# EAGLE board Board_layout (EAGLE 9.6.2)
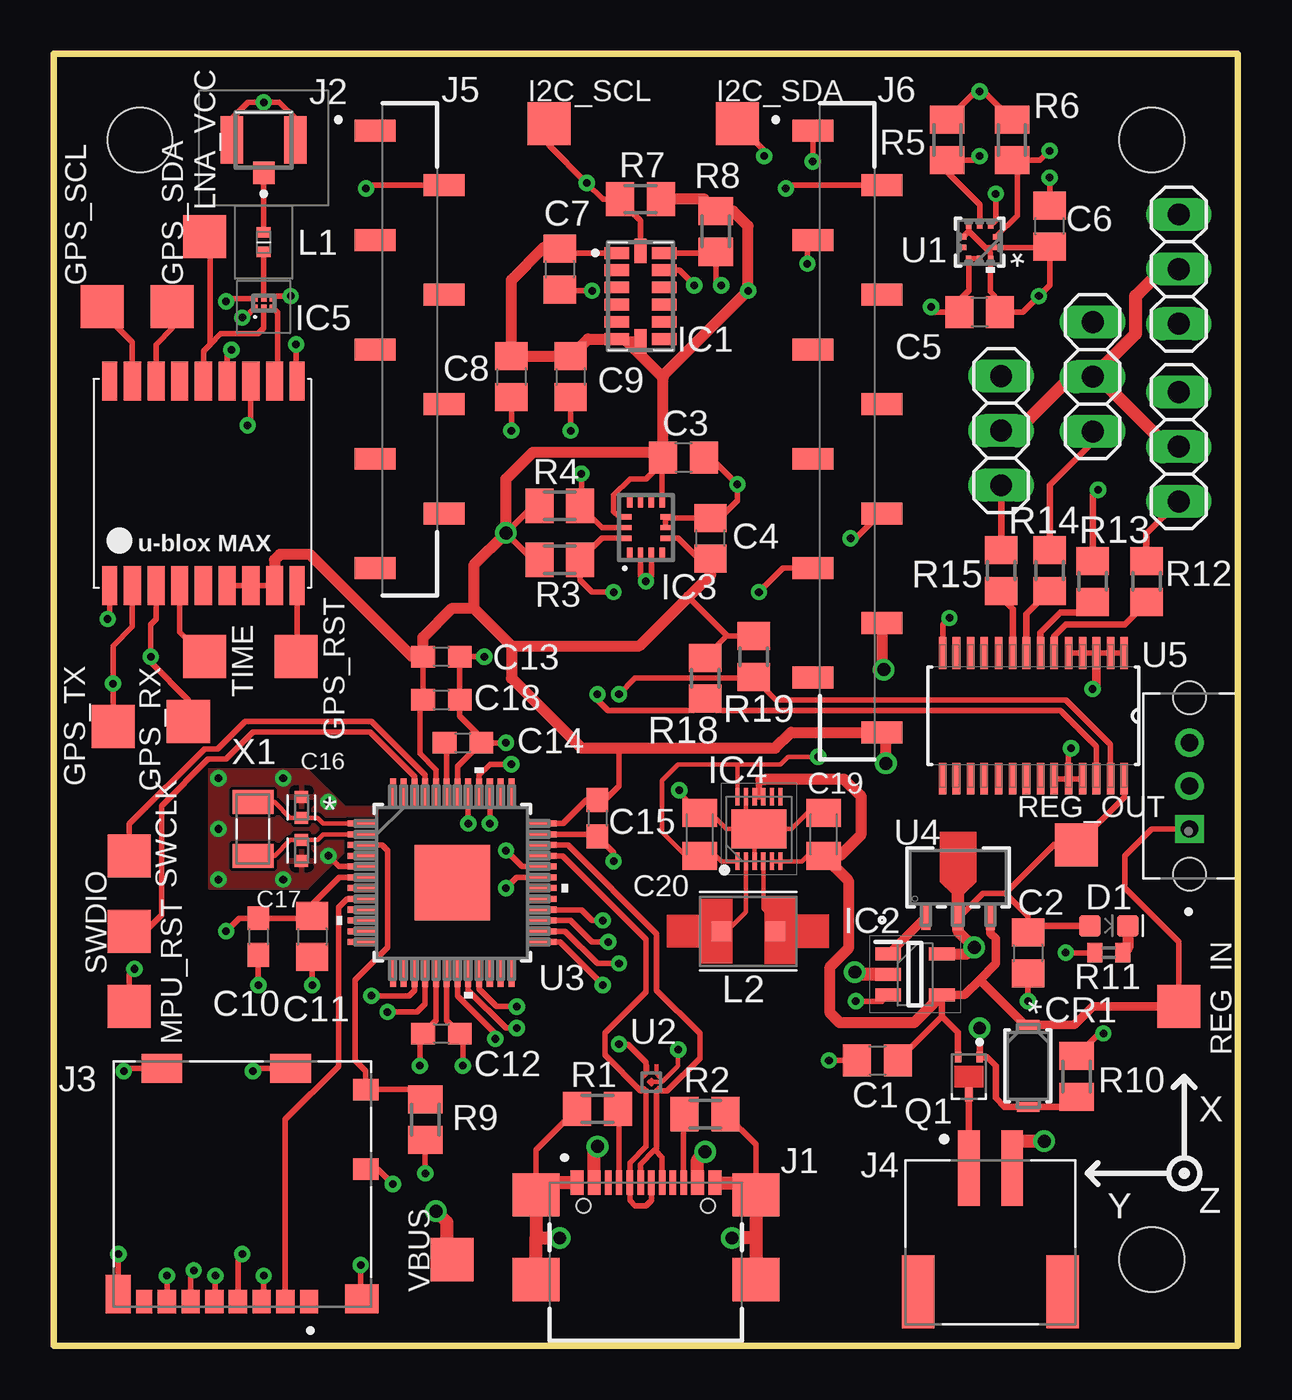
[diagram p0: board, top side]
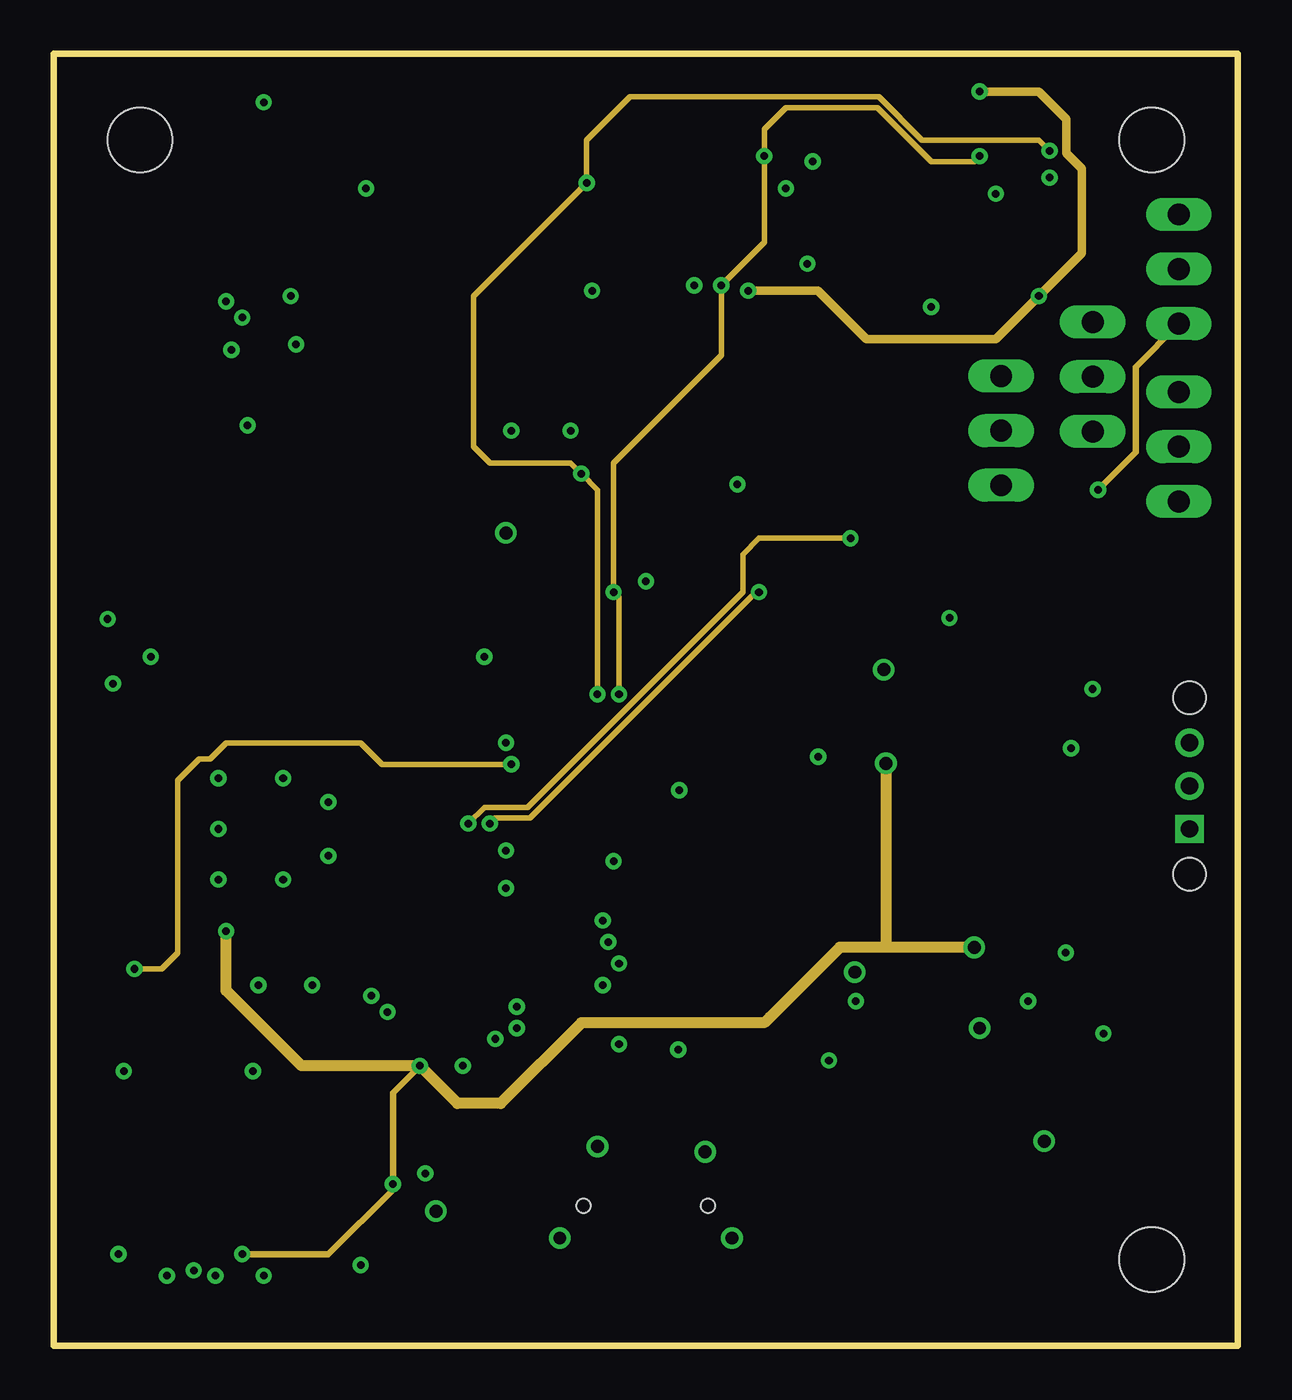
[diagram p1: board, inner layer Route2]
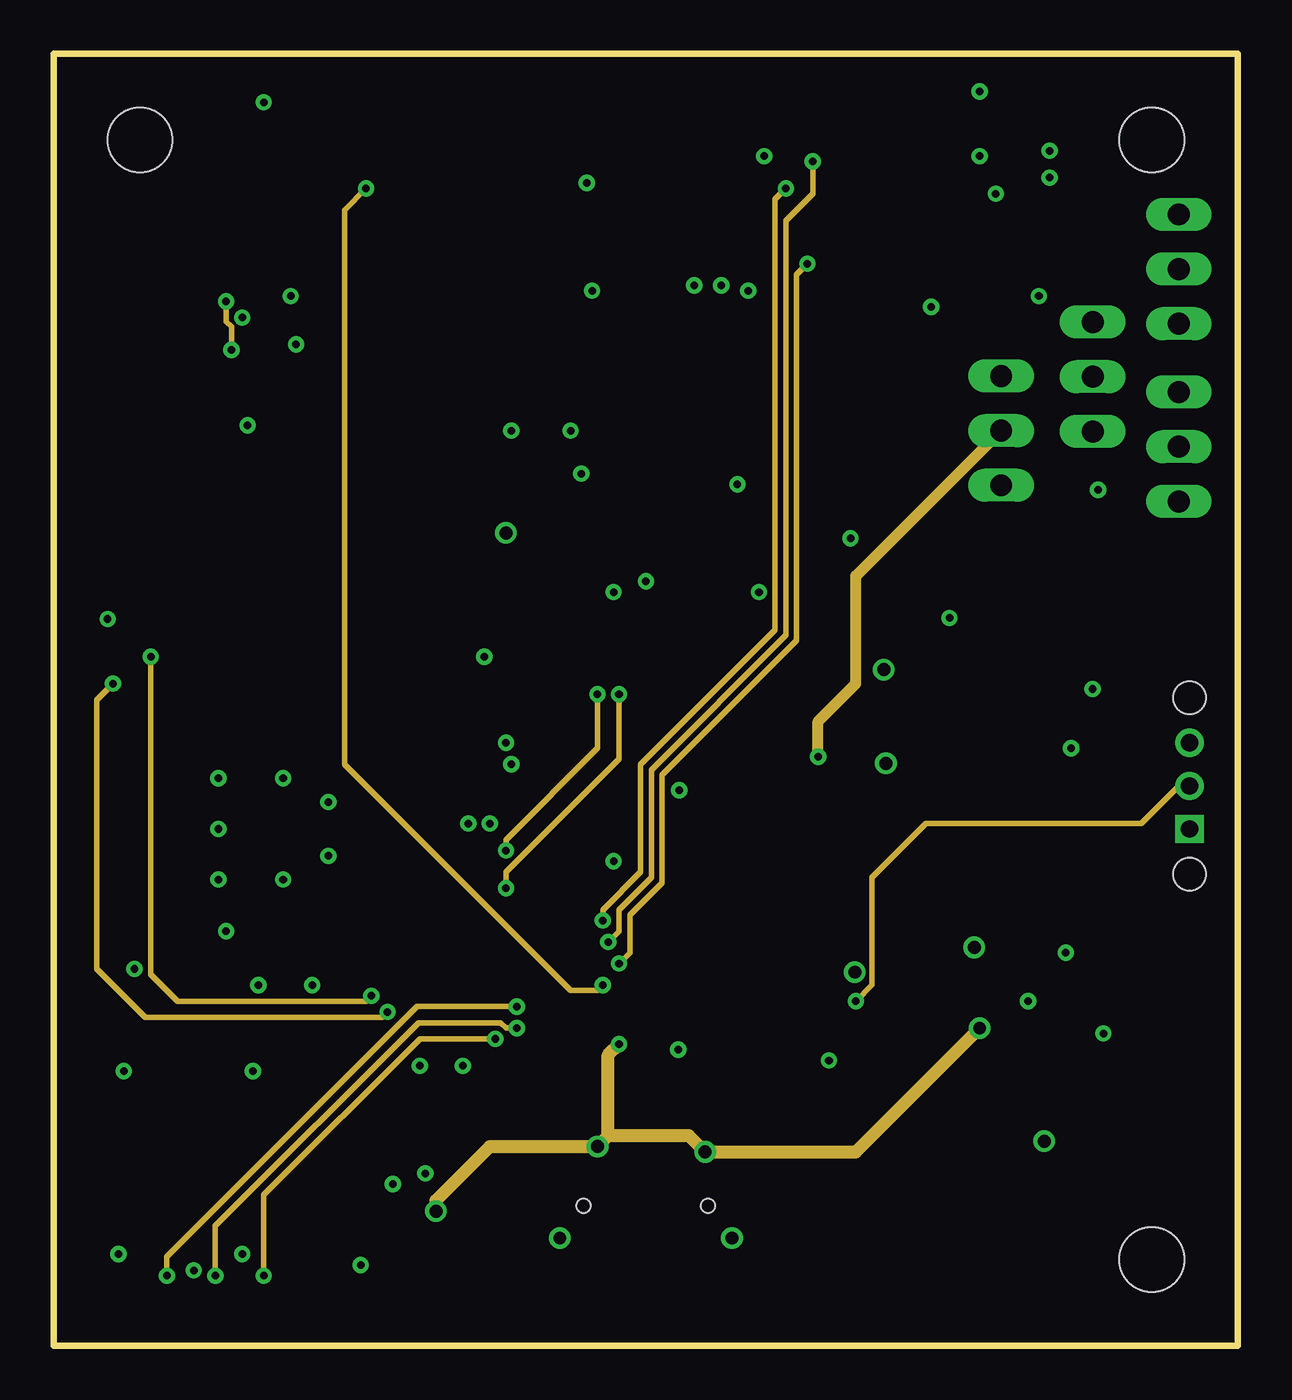
[diagram p2: board, inner layer Route15]
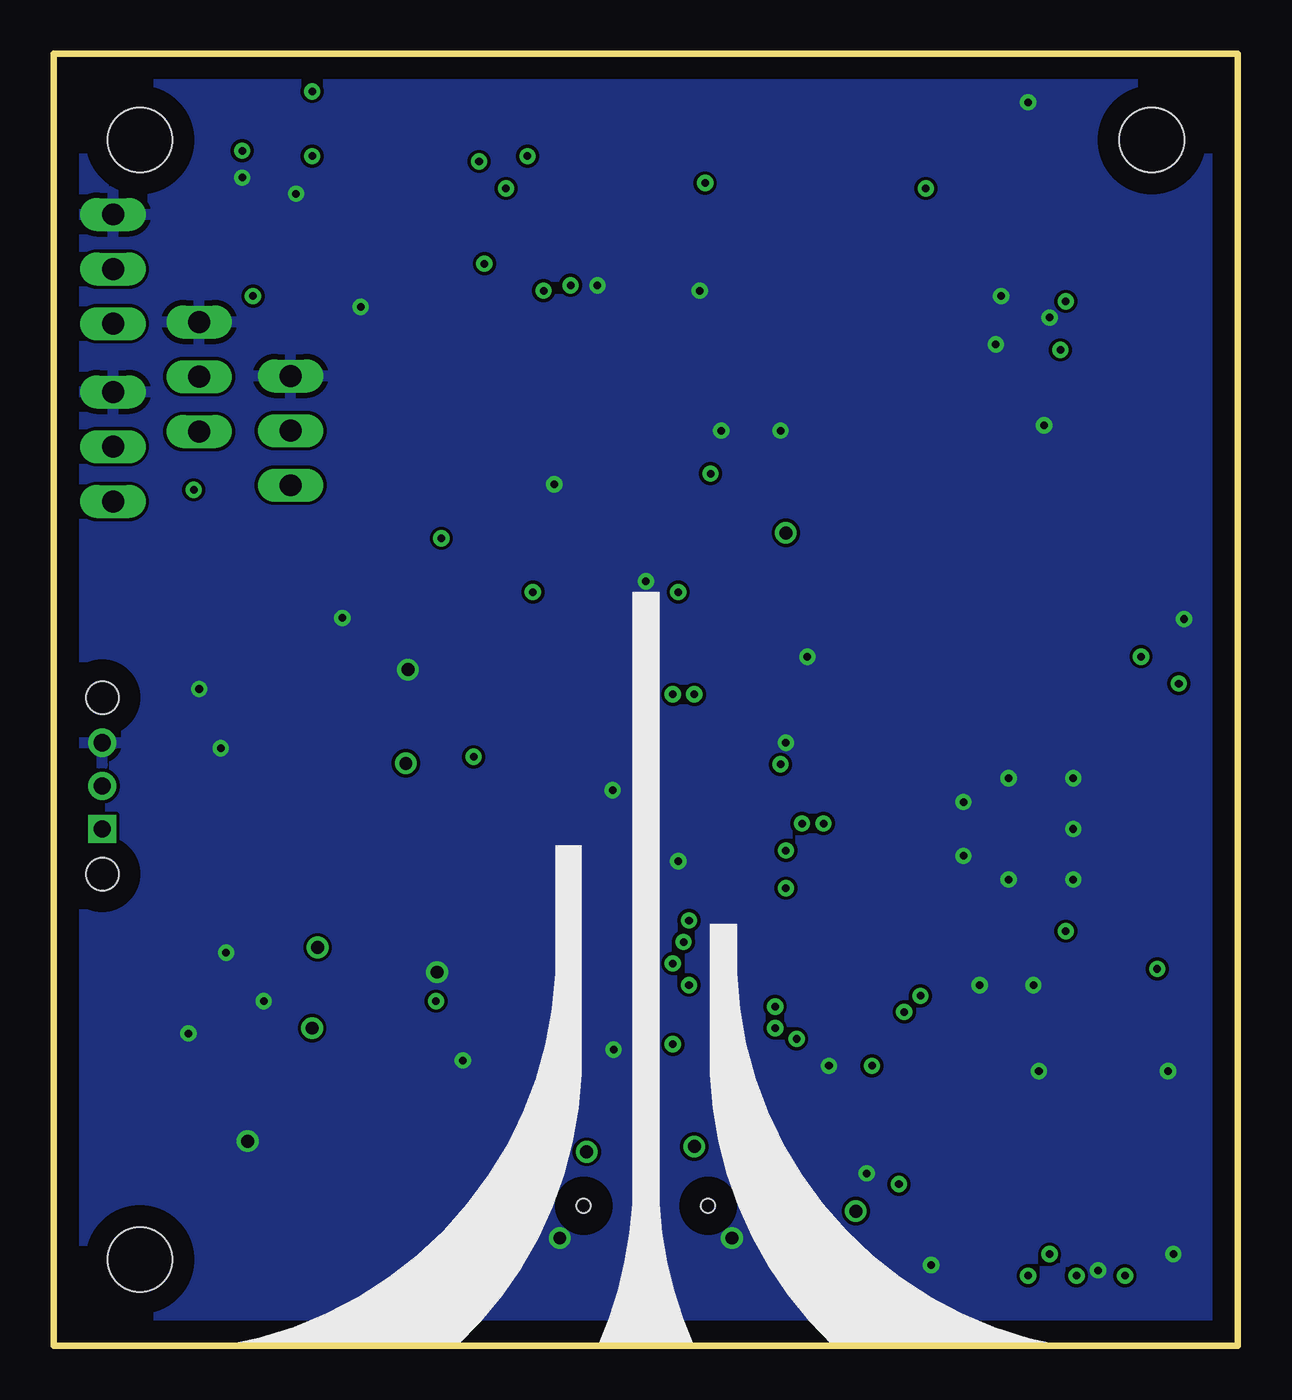
[diagram p3: board, bottom side, seen from below]

Size 55 x 60 mm. Coordinates in mm from the lower left corner, seen from the top.
Outline: 0,0 0,60 55,60 55,0 0,0
Copper layers (1+2*15+16): Top 0.035mm / dielectric 1.5mm / Route2 0.035mm / dielectric 0.15mm / Route15 0.035mm / dielectric 0.2mm / Bottom 0.035mm
Design rules "default *": minimum track width 6mil, minimum drill 0.35mm, track to track 6mil, track to pad 6mil, pad to pad 6mil, via to via 6mil, smd to smd 6mil, copper to edge 40mil, drill to drill 6mil, minimum pad ring 10mil, minimum via ring 8mil, stop-mask expansion 4mil, vias tented up to drill 0mil, thermal gap 10mil
Holes 3 mm at 51,56 4,56 51,4

## Footprints (pad centres in the part's own frame; a part is rotated, then mirrored left to right if it is on the bottom)
C0805 = smd 1.3 x 1.5: 1 -0.95,0; 2 0.95,0
C0603 = smd 1.1 x 1: 1 -0.85,0; 2 0.85,0
CAPC1005X60 = smd 0.56 x 0.629: 1 -0.485,0; 2 0.485,0
C0805K = smd 1.3 x 1.6: 1 -1,0; 2 1,0
CR_5817PL-TP_MCC = smd 0.457 x 1.041: 1 -1.905,0; 2 1.905,0
LED-0603 = smd 1 x 1: A -0.877,0; C 0.877,0
TP20SQ = smd 2 x 2: TP 0,0
CC-14-1 = smd 1.145 x 0.55: 1 -1.097,2; 2 -1.097,1.2; 3 -1.097,0.4; 4 -1.097,-0.4; 5 -1.097,-1.2; 6 -1.097,-2; 8 1.097,-2; 9 1.097,-1.2; 10 1.097,-0.4; 11 1.097,0.4; 12 1.097,1.2; 13 1.097,2 | smd 0.55 x 1.145: 7 0,-2.098; 14 0,2.098
SOT95P275X130-5N = smd 1.2 x 0.6: 1 -1.25,0.95; 2 -1.25,0; 3 -1.25,-0.95; 4 1.25,-0.95; 5 1.25,0.95
LGA-14(2.5X3X0.86) = smd 0.475 x 0.25: 1 -1.163,0.75; 2 -1.163,0.25; 3 -1.163,-0.25; 4 -1.163,-0.75; 8 1.163,-0.75; 9 1.163,-0.25; 10 1.163,0.25; 11 1.163,0.75 | smd 0.25 x 0.475: 5 -0.5,-0.912; 6 0,-0.912; 7 0.5,-0.912; 12 0.5,0.912; 13 0,0.912; 14 -0.5,0.912
SON40P300X300X75-13N = smd 0.8 x 0.2: 1 -1.5,1; 2 -1.5,0.6; 3 -1.5,0.2; 4 -1.5,-0.2; 5 -1.5,-0.6; 6 -1.5,-1; 7 1.5,-1; 8 1.5,-0.6; 9 1.5,-0.2; 10 1.5,0.2; 11 1.5,0.6; 12 1.5,1 | smd 1.8 x 2.55: 13 0,0
BGS12SN6E6327XTSA1 = smd 0.25 x 0.25: 1 -0.025,0.4; 2 -0.025,0; 3 -0.025,-0.4; 4 0.375,-0.4; 5 0.375,0; 6 0.375,0.4
GCT_USB4110-GF-A_REVB = smd 0.6 x 1.15: A1/B12 -3.2,1.075; A4/B9 -2.4,1.075; B1/A12 3.2,1.075; B4/A9 2.4,1.075 | smd 0.3 x 1.15: A5 -1.25,1.075; A6 -0.25,1.075; A7 0.25,1.075; A8 1.25,1.075; B5 1.75,1.075; B6 0.75,1.075; B7 -0.75,1.075; B8 -1.75,1.075 | smd 2.18 x 2: S1 -5.11,0.5; S2 5.11,0.5; S3 -5.11,-3.43; S4 5.11,-3.43 | hole 0.65: -2.89,0; 2.89,0
23370191 = smd 1 x 1.05: 1 0,-1.525 | smd 1.05 x 2.2: 2 -1.475,0; 3 1.475,0
MOLEX_104031-0811 = smd 0.85 x 1.1: 1 3.105,-5.45; 2 2.005,-5.45; 3 0.905,-5.45; 4 -0.195,-5.45; 5 -1.295,-5.45; 6 -2.395,-5.45; 7 -3.495,-5.45 | smd 0.75 x 1.1: 8 -4.545,-5.45 | smd 1.2 x 1: 9 5.74,0.7; 10 5.74,4.4 | smd 1.55 x 1.35: G1 5.565,-5.325 | smd 1.17 x 1.8: G2 -5.755,-5.1 | smd 1.9 x 1.35: G3 -3.73,5.375; G4 2.24,5.375
JST_S2B-PH-SM4-TB(LF)(SN) = smd 1 x 3.5: 1 -1,0; 2 1,0 | smd 1.5 x 3.4: S1 -3.35,-5.75; S2 3.35,-5.75
SAMTEC_SSM-109-L-SV = smd 1.02 x 1.905: 01 10.16,1.603; 02 7.62,-1.603; 03 5.08,1.603; 04 2.54,-1.603; 05 0,1.603; 06 -2.54,-1.603; 07 -5.08,1.603; 08 -7.62,-1.603; 09 -10.16,1.603
SAMTEC_SSM-112-L-SV-P = smd 1.02 x 1.905: 01 13.97,1.603; 02 11.43,-1.603; 03 8.89,1.603; 04 6.35,-1.603; 05 3.81,1.603; 06 1.27,-1.603; 07 -1.27,1.603; 08 -3.81,-1.603; 09 -6.35,1.603; 10 -8.89,-1.603; 11 -11.43,1.603; 12 -13.97,-1.603
1X03 = drill 1.016 long: 1 -2.54,0; 2 0,0; 3 2.54,0
LQW15CNR20J00B = smd 0.5 x 0.66: 1 -0.45,0; 2 0.45,0
IND_LQH43PN2R2M26L = smd 0.9 x 0.9: 1 -1.25,0; 2 1.25,0
TRANS_DMG3415UFY4Q-7 = smd 0.5 x 0.31: 1 -0.9,0.5; 2 -0.9,-0.5 | smd 0.65 x 0.31: 3 0.825,0
M0805 = smd 1.3 x 1.6: 1 -0.95,0; 2 0.95,0
R0402 = smd 0.7 x 0.9: 1 -0.65,0; 2 0.65,0
R0805 = smd 1.3 x 1.5: 1 -0.95,0; 2 0.95,0
SW_OS102011MS2QN1 = drill 0.8 square: 1 -2,0 | drill 0.8: 2 0,0; 3 2,0 | hole 1.5: -4.1,0; 4.1,0
BMP390L_BOS = smd 0.279 x 0.254: 1 -0.76,0.25; 2 -0.76,-0.25; 6 0.76,-0.25; 7 0.76,0.25 | smd 0.254 x 0.279: 3 -0.5,-0.76; 4 0,-0.76; 5 0.5,-0.76; 8 0.5,0.76; 9 0,0.76; 10 -0.5,0.76
DPW4 = smd 0.025 x 0.025: 1 -0.417,0.24; 2 -0.417,-0.24; 3 0.417,-0.24; 4 0.417,0.24 | smd 0 x 0 bottom: 5 0,0
TQFP48_7X7MC_MCH = smd 1.341 x 0.279: 1 -4.176,2.75; 2 -4.176,2.25; 3 -4.176,1.75; 4 -4.176,1.25; 5 -4.176,0.75; 6 -4.176,0.25; 7 -4.176,-0.25; 8 -4.176,-0.75; 9 -4.176,-1.25; 10 -4.176,-1.75; 11 -4.176,-2.25; 12 -4.176,-2.75; 25 4.176,-2.75; 26 4.176,-2.25; 27 4.176,-1.75; 28 4.176,-1.25; 29 4.176,-0.75; 30 4.176,-0.25; 31 4.176,0.25; 32 4.176,0.75; 33 4.176,1.25; 34 4.176,1.75; 35 4.176,2.25; 36 4.176,2.75 | smd 0.279 x 1.341: 13 -2.75,-4.176; 14 -2.25,-4.176; 15 -1.75,-4.176; 16 -1.25,-4.176; 17 -0.75,-4.176; 18 -0.25,-4.176; 19 0.25,-4.176; 20 0.75,-4.176; 21 1.25,-4.176; 22 1.75,-4.176; 23 2.25,-4.176; 24 2.75,-4.176; 37 2.75,4.176; 38 2.25,4.176; 39 1.75,4.176; 40 1.25,4.176; 41 0.75,4.176; 42 0.25,4.176; 43 -0.25,4.176; 44 -0.75,4.176; 45 -1.25,4.176; 46 -1.75,4.176; 47 -2.25,4.176; 48 -2.75,4.176 | smd 3.505 x 3.505: EPAD 0,0
PCP-3_2P5X4P5_ONS = smd 0.406 x 1.194: 1 -1.5,-1.841; 3 1.5,-1.841 | smd 0.508 x 1.194: 2 0,-1.841
SOP65P640X110-28N = smd 1.473 x 0.356: 1 -2.921,4.216; 2 -2.921,3.581; 3 -2.921,2.921; 4 -2.921,2.286; 5 -2.921,1.626; 6 -2.921,0.965; 7 -2.921,0.33; 8 -2.921,-0.33; 9 -2.921,-0.965; 10 -2.921,-1.626; 11 -2.921,-2.286; 12 -2.921,-2.921; 13 -2.921,-3.581; 14 -2.921,-4.216; 15 2.921,-4.216; 16 2.921,-3.581; 17 2.921,-2.921; 18 2.921,-2.286; 19 2.921,-1.626; 20 2.921,-0.965; 21 2.921,-0.33; 22 2.921,0.33; 23 2.921,0.965; 24 2.921,1.626; 25 2.921,2.286; 26 2.921,2.921; 27 2.921,3.581; 28 2.921,4.216
MAX-M8 = smd 1.8 x 0.7: 1_GND 4.95,-4.4; 9_RESET_N 4.95,4.3; 10_GND -4.55,4.3; 18_SAFEBOOT_N -4.55,-4.4 | smd 1.8 x 0.8: 2_TXD 4.95,-3.35; 3_RXD 4.95,-2.25; 4_TIMEPULSE 4.95,-1.15; 5_EXTINT 4.95,-0.05; 6_V_BCKP 4.95,1.05; 7_VCC_IO 4.95,2.15; 8_VCC 4.95,3.25; 11_RF_IN -4.55,3.25; 12_GND -4.55,2.15; 13_LNA_EN -4.55,1.05; 14_VCC_RF -4.55,-0.05; 15_V_ANT/RESERVED -4.55,-1.15; 16_SDA -4.55,-2.25; 17_SCL -4.55,-3.35
XTAL_ECS-.327-7-34B-TR = smd 1.1 x 1.9: 1 -1.25,0; 2 1.25,0

## Placement (x,y rotation side)
C1  10u  [C0805]  38.25,13.25 0 top
C2  10u  [C0805]  45.25,18.25 270 top
C3  0.1u  [C0805]  29.25,41.25 0 top
C4  0.1u  [C0805]  30.5,37.5 90 top
C5  0.1u  [C0805]  43,48 180 top
C6  0.1u  [C0805]  46.25,52 90 top
C7  0.1u  [C0805]  23.5,50 270 top
C8  0.1u  [C0805]  21.25,45 270 top
C9  10u  [C0805]  24,45 270 top
C10  0.1u  [C0603]  9.5,19 270 top
C11  10u  [C0805]  12,19 270 top
C12  0.1u  [C0603]  18,14.5 0 top
C13  0.1u  [C0603]  18,32 0 top
C14  1u  [C0603]  19,28 0 top
C15  0.1u  [C0603]  25.25,24.5 270 top
C16  11p  [CAPC1005X60]  11.5,25 90 top
C17  11p  [CAPC1005X60]  11.5,23 270 top
C18  10u  [C0603]  18,30 0 top
C19  10u  [C0805K]  35.75,23.75 90 top
C20  10u  [C0805K]  30,23.75 90 top
CR1  SM5817PL-TP  [CR_5817PL-TP_MCC]  45.25,13 270 top
D1  WHITE  [LED-0603]  49,19.5 0 top
E$1  [LOGO]  27.5,0 0 top
GPS_RST  TPSQTP20SQ  [TP20SQ]  11.25,32 270 top
GPS_RX  TPSQTP20SQ  [TP20SQ]  6.25,29 90 top
GPS_SCL  TPSQTP20SQ  [TP20SQ]  2.25,48.25 270 top
GPS_SDA  TPSQTP20SQ  [TP20SQ]  5.5,48.25 270 top
GPS_TX  TPSQTP20SQ  [TP20SQ]  2.75,28.75 90 top
I2C_SCL  TPSQTP20SQ  [TP20SQ]  23,56.75 0 top
I2C_SDA  TPSQTP20SQ  [TP20SQ]  31.75,56.75 0 top
IC1  ADXL375BCCZ  [CC-14-1]  27.25,48.75 0 top
IC2  S-816A50AMC-BAZT2G  [SOT95P275X130-5N]  40,17.25 0 top
IC3  ISM330DHCXTR  [LGA-14(2.5X3X0.86)]  27.5,38 90 top
IC4  ISL9110IRT7Z-T7A  [SON40P300X300X75-13N]  32.75,24 90 top
IC5  BGA725L6E6327FTSA1  [BGS12SN6E6327XTSA1]  9.75,48.25 90 top
J1  USB4110-GF-A_REVB  [GCT_USB4110-GF-A_REVB]  27.5,6.5 0 top
J2  2337019-1  [23370191]  9.75,56 0 top
J3  104031-0811  [MOLEX_104031-0811]  8.75,7.5 0 top
J4  S2B-PH-SM4-TB(LF)(SN)  [JST_S2B-PH-SM4-TB(LF)(SN)]  43.5,8.25 0 top
J5  SSM-109-L-SV  [SAMTEC_SSM-109-L-SV]  16.53,46.27 90 top
J6  SSM-112-L-SV-P  [SAMTEC_SSM-112-L-SV-P]  36.85,42.46 90 top
JP1  [1X03]  52.25,41.75 90 top
JP2  [1X03]  52.25,50 90 top
JP3  [1X03]  48.25,45 90 top
JP4  [1X03]  44,42.5 90 top
L1  LQW15AN7N5G8ZD  [LQW15CNR20J00B]  9.75,51.25 90 top
L2  LQH43PN2R2M26L  [IND_LQH43PN2R2M26L]  32.25,19.25 0 top
LNA_VCC  TPSQTP20SQ  [TP20SQ]  7,51.5 270 top
MPU_RST  TPSQTP20SQ  [TP20SQ]  3.5,15.75 0 top
Q1  DMG3415UFY4Q-7  [TRANS_DMG3415UFY4Q-7]  42.5,12.5 270 top
R1  5.1K  [M0805]  25.25,11 0 top
R2  5.1K  [M0805]  30.25,10.75 0 top
R3  10K  [M0805]  23.5,36.5 180 top
R4  10K  [M0805]  23.5,39 180 top
R5  10K  [M0805]  41.5,56 90 top
R6  10K  [M0805]  44.5,56 90 top
R7  10K  [M0805]  27.25,53.25 180 top
R8  10K  [M0805]  30.75,51.75 270 top
R9  10K  [M0805]  17.25,10.5 90 top
R10  10K  [M0805]  47.5,12.5 270 top
R11  620 Ω  [R0402]  49,18.25 0 top
R12  220  [R0805]  50.75,35.5 90 top
R13  220  [R0805]  48.25,35.5 90 top
R14  220  [R0805]  46.25,36 90 top
R15  220  [R0805]  44,36 90 top
R18  10K  [R0805]  30.25,31 270 top
R19  10K  [R0805]  32.5,32 90 top
REG_IN  TPSQTP20SQ  [TP20SQ]  52.25,15.75 0 top
REG_OUT  TPSQTP20SQ  [TP20SQ]  47.5,23.25 0 top
S1  OS102011MS2QN1  [SW_OS102011MS2QN1]  52.75,26 90 top
SWCLK  TPSQTP20SQ  [TP20SQ]  3.5,22.75 0 top
SWDIO  TPSQTP20SQ  [TP20SQ]  3.5,19.25 0 top
TIME  TPSQTP20SQ  [TP20SQ]  7,32 270 top
U1  BMP390L  [BMP390L_BOS]  43,51.25 180 top
U2  TPD4E101DPWR  [DPW4]  27.75,12.25 90 top
U3  ATSAMD21G15B-AFT  [TQFP48_7X7MC_MCH]  18.5,21.5 0 top
U4  2SA2125-TD-E  [PCP-3_2P5X4P5_ONS]  42,21.75 0 top
U5  PCA9685PW,112  [SOP65P640X110-28N]  45.5,29.25 270 top
U$1  MAX-M8  [MAX-M8]  7,40.25 270 top
VBUS  TPSQTP20SQ  [TP20SQ]  18.5,4 180 top
X1  ECS-.327-7-34B-TR  [XTAL_ECS-.327-7-34B-TR]  9.25,24 90 top

## Library data of the parts
C1-C8 C10-C15 C18-C20 R1-R15 R18 R19 = resistor
C9 = resistor; POLARIZED: True
C16 C17 = Capacitor; CATEGORY: Capacitor
CR1 = SM5817PL-TP; COPYRIGHT: Copyright (C) 2022 Ultra Librarian. All rights reserved.; DIGI-KEY_PART_NUMBER_1: SM5817PL-TPMSTR-ND; DIGI-KEY_PART_NUMBER_2: SM5817PL-TPMSCT-ND; DIGI-KEY_PART_NUMBER_3: SM5817PL-TPMSDKR-ND; MANUFACTURER_PART_NUMBER: SM5817PL-TP; MFR_NAME: MCC
D1 = SparkFun-LED; PROD_ID: DIO-09004
E$1 = logo
GPS_RST GPS_RX GPS_SCL GPS_SDA GPS_TX I2C_SCL I2C_SDA LNA_VCC MPU_RST REG_IN REG_OUT SWCLK SWDIO TIME VBUS = testpad
IC1 = ADXL375BCCZ; DESCRIPTION: ADXL375BCCZ Analog Devices, 3-Axis Accelerometer, I2C, Serial-3 Wire, Serial-4 Wire, Serial-SPI, 14-Pin LGA; HEIGHT: mm; MANUFACTURER_NAME: Analog Devices; MANUFACTURER_PART_NUMBER: ADXL375BCCZ; MOUSER_PART_NUMBER: 584-ADXL375BCCZ; MOUSER_PRICE-STOCK: https://www.mouser.co.uk/ProductDetail/Analog-Devices/ADXL375BCCZ?qs=S4ILP0tmc7Q%2Fd%2FHPWf9YpQ%3D%3D
IC2 = S-816A50AMC-BAZT2G; DESCRIPTION: IC REG LINEAR 5V 1A SOT23-5; HEIGHT: 1.3mm; MANUFACTURER_NAME: ABLIC Inc.; MANUFACTURER_PART_NUMBER: S-816A50AMC-BAZT2G; MOUSER_PART_NUMBER: 628-S-816A50AMC-BAZG; MOUSER_PRICE-STOCK: https://www.mouser.com/Search/Refine.aspx?Keyword=628-S-816A50AMC-BAZG
IC3 = ISM330DHCXTR; DESCRIPTION: IMUs - Inertial Measurement Units VFLGA2.5X3X.86 14L P.5 L.475X.25; HEIGHT: mm; MANUFACTURER_NAME: STMicroelectronics; MANUFACTURER_PART_NUMBER: ISM330DHCXTR; MOUSER_PART_NUMBER: 511-ISM330DHCXTR; MOUSER_PRICE-STOCK: https://www.mouser.co.uk/ProductDetail/STMicroelectronics/ISM330DHCXTR?qs=%252B6g0mu59x7Jv2Xps2dM6Xw%3D%3D
IC4 = ISL9110IRT7Z-T7A; DESCRIPTION: Switching Voltage Regulators 1 2A SINGLE IND BUCK BOOST 3 3V 12LD; HEIGHT: 0.75mm; MANUFACTURER_NAME: Renesas Electronics; MANUFACTURER_PART_NUMBER: ISL9110IRT7Z-T7A; MOUSER_PART_NUMBER: 968-ISL9110IRT7Z-T7A; MOUSER_PRICE-STOCK: https://www.mouser.co.uk/ProductDetail/Renesas-Intersil/ISL9110IRT7Z-T7A?qs=dAsayXGOMrujtMdmCjK0tg%3D%3D
IC5 = BGA725L6E6327FTSA1; DESCRIPTION: INFINEON - BGA725L6E6327FTSA1 - RF AMP, 20DB, 1.615GHZ, 3.6V, TSLP-6; HEIGHT: mm; MANUFACTURER_NAME: Infineon; MANUFACTURER_PART_NUMBER: BGA725L6E6327FTSA1; MOUSER_PART_NUMBER: 726-BGA725L6E6327FTS; MOUSER_PRICE-STOCK: https://www.mouser.co.uk/ProductDetail/Infineon-Technologies/BGA725L6E6327FTSA1?qs=4MqXaUMeF57lT69yR2PUGQ%3D%3D
J1 = USB4110-GF-A_REVB; DESCRIPTION: USB-C (USB TYPE-C) USB 2.0 Receptacle Connector 24 (16+8 Dummy) Position Surface Mount, Right Angle; Through Hole; DIGI-KEY_PART_NUMBER: 2073-USB4110-GF-A-2-ND; MF: GCT; MP: USB4110-GF-A; PACKAGE: None; PURCHASE-URL: https://pricing.snapeda.com/search/part/USB4110-GF-A/?ref=eda
J2 = 2337019-1; DESCRIPTION: RF Connectors / Coaxial Connectors MicroCoax receptacle UMCC Gen 1; HEIGHT: 1.4mm; MANUFACTURER_NAME: TE Connectivity; MANUFACTURER_PART_NUMBER: 2337019-1; MOUSER_PART_NUMBER: 571-2337019-1; MOUSER_PRICE-STOCK: https://www.mouser.co.uk/ProductDetail/TE-Connectivity/2337019-1?qs=l4Gc20tDgJIuN7nS9rJkJw%3D%3D
J3 = 104031-0811; DESCRIPTION: 10 (8 + 2) Position Card Connector Secure Digital - microSD™ Surface Mount, Right Angle Gold; DIGI-KEY_PART_NUMBER: WM6357TR-ND; MF: Molex; MP: 1040310811; PACKAGE: None
J4 = S2B-PH-SM4-TB_LF__SN_; DESCRIPTION: Connector Header Surface Mount, Right Angle 2 position 0.079 (2.00mm); DIGI-KEY_PART_NUMBER: 455-1749-1-ND; MF: JST Sales; MP: S2B-PH-SM4-TB(LF)(SN); PACKAGE: None
J5 = SSM-109-L-SV; DESCRIPTION: 9 Position Receptacle, Bottom Entry Connector 0.100 (2.54mm) Surface Mount Gold; DIGI-KEY_PART_NUMBER: 612-SSM-109-L-SV-BE-LC-TR-ND; MF: Samtec; MP: SSM-109-L-SV; PACKAGE: None; PURCHASE-URL: https://pricing.snapeda.com/search/part/SSM-109-L-SV/?ref=eda
J6 = SSM-112-L-SV-P; DESCRIPTION: 12 Position Receptacle, Pass Through Connector 0.100 (2.54mm) Surface Mount Gold; DIGI-KEY_PART_NUMBER: SSM-112-L-SV-P-TR-ND; MF: Samtec; MP: SSM-112-L-SV-P; PACKAGE: None; PURCHASE-URL: https://pricing.snapeda.com/search/part/SSM-112-L-SV-P/?ref=eda
JP1-JP4 = pinhead
L1 = LQW15AN7N5G8ZD; DESCRIPTION: LQW15AN_8Z Series Inductor 7.5nH +/-2% 0402 (1005); HEIGHT: 0.6mm; MANUFACTURER_NAME: Murata Electronics; MANUFACTURER_PART_NUMBER: LQW15AN7N5G8ZD; MOUSER_PART_NUMBER: 81-LQW15AN7N5G8ZD; MOUSER_PRICE-STOCK: https://www.mouser.com/Search/Refine.aspx?Keyword=81-LQW15AN7N5G8ZD
L2 = LQH43PN2R2M26L; DESCRIPTION: Inductor with Inductance: 2.2uH Tol. +/-20%, Package: 1812 (4532); DIGI-KEY_PART_NUMBER: 490-12049-1-ND; MF: Murata; MP: LQH43PN2R2M26L; PACKAGE: NONSTANDARD; PURCHASE-URL: https://pricing.snapeda.com/search/part/LQH43PN2R2M26L/?ref=eda
Q1 = DMG3415UFY4Q-7; DESCRIPTION: P-Channel 16 V 2.5A (Ta) 650mW (Ta) Surface Mount X2-DFN2015-3; DIGI-KEY_PART_NUMBER: DMG3415UFY4Q-7DICT-ND; MF: Diodes Inc.; MP: DMG3415UFY4Q-7; PACKAGE: DFN-2 Diodes Inc.; PURCHASE-URL: https://pricing.snapeda.com/search/part/DMG3415UFY4Q-7/?ref=eda
S1 = OS102011MS2QN1; DESCRIPTION: SLIDE SWITCH SPDT T/H ON-ON BBM; DIGI-KEY_PART_NUMBER: CKN12284-ND; MF: C&K; MP: OS102011MS2QN1; PACKAGE: None; PURCHASE-URL: https://pricing.snapeda.com/search/part/OS102011MS2QN1/?ref=eda
U1 = BMP390L; COPYRIGHT: Copyright (C) 2022 Ultra Librarian. All rights reserved.; DIGI-KEY_PART_NUMBER_1: 828-BMP390LTR-ND; DIGI-KEY_PART_NUMBER_2: 828-BMP390LCT-ND; MANUFACTURER_PART_NUMBER: BMP390L; MFR_NAME: Bosch Sensortec
U2 = TPD4E101DPWR; COPYRIGHT: Copyright (C) 2021 Ultra Librarian. All rights reserved.; DIGI-KEY_PART_NUMBER_1: 2156-TPD4E101DPWR-ND; DIGI-KEY_PART_NUMBER_2: 296-39345-1-ND; DIGI-KEY_PART_NUMBER_3: 296-39345-2-ND; DIGI-KEY_PART_NUMBER_4: 296-39345-6-ND; DIGI-KEY_PART_NUMBER_5: TPD4E101DPWR-ND; MANUFACTURER_PART_NUMBER: TPD4E101DPWR; MFR_NAME: Texas Instruments
U3 = ATSAMD21G15B-AFT; COPYRIGHT: Copyright (C) 2021 Ultra Librarian. All rights reserved.; DIGI-KEY_PART_NUMBER_1: 1611-ATSAMD21G15B-AFTCT-ND; DIGI-KEY_PART_NUMBER_2: ATSAMD21G15B-AFTCT-ND; DIGI-KEY_PART_NUMBER_3: ATSAMD21G15B-AFTDKR-ND; DIGI-KEY_PART_NUMBER_4: ATSAMD21G15B-AFTTR-ND; MANUFACTURER_PART_NUMBER: ATSAMD21G15B-AFT; MFR_NAME: Microchip
U4 = ‎2SA2125; COPYRIGHT: Copyright (C) 2022 Ultra Librarian. All rights reserved.; DIGI-KEY_PART_NUMBER_1: 2SA2125-TD-EOSTR-ND; DIGI-KEY_PART_NUMBER_2: 2SA2125-TD-EOSCT-ND; DIGI-KEY_PART_NUMBER_3: 2SA2125-TD-EOSDKR-ND; MANUFACTURER_PART_NUMBER: 2SA2125-TD-E; MFR_NAME: onsemi
U5 = PCA9685PW_112; DESCRIPTION: LED Driver IC 16 Output Linear - PWM Dimming 25mA 28-TSSOP; DIGI-KEY_PART_NUMBER: 568-8366-5-ND; MF: NXP USA; MP: PCA9685PW,112; PACKAGE: TSSOP-28 NXP Semiconductors; PURCHASE-URL: https://pricing.snapeda.com/search/part/PCA9685PW,112/?ref=eda
U$1 = ubloxLib
X1 = ECS-.327-7-34B-TR; DESCRIPTION: 32.768 kHz ±20ppm Crystal 7pF 70 kOhms 2-SMD, No Lead; DIGI-KEY_PART_NUMBER: XC1656CT-ND; MF: ECS Inc.; MP: ECS-.327-7-34B-TR; PACKAGE: SMD-2 ECS International; PURCHASE-URL: https://pricing.snapeda.com/search/part/ECS-.327-7-34B-TR/?ref=eda

## Nets
3V3: C2.1 C3.1 C4.1 C5.1 C6.1 C7.1 C8.1 C9.1 C10.1 C11.1 C12.1 C13.1 C15.1 C18.1 D1.A IC1.1 IC1.6 IC1.7 IC2.5 IC3.5 IC3.8 IC3.12 J3.4 J3.9 J6.12 R3.2 R4.2 R5.2 R6.2 R7.1 R8.1 R18.1 R19.2 REG_OUT.TP U1.1 U1.5 U1.6 U1.10 U3.6 U3.17 U3.36 U3.44 U4.2 U5.28 U$1.6_V_BCKP U$1.7_VCC_IO U$1.8_VCC
+5V: C20.1 IC4.1 IC4.12 JP1.2 JP2.2 JP3.2 JP4.2
ANTENNA: J2.1 L1.2
BRD_EN: IC2.3 S1.2
D+: J1.A6 J1.B6 U2.2 U3.34
D-: J1.A7 J1.B7 U2.1 U3.33
DIO0: J6.09 U3.39
DIO1: J6.08 U3.41
GND: C1.1 C2.2 C3.2 C4.2 C5.2 C6.2 C7.2 C8.2 C9.2 C10.2 C11.2 C12.2 C13.2 C14.2 C15.2 C16.2 C17.2 C18.2 C19.2 C20.2 IC1.12 IC2.2 IC3.2 IC3.3 IC3.6 IC3.7 IC4.3 IC4.11 IC4.13 IC5.1 IC5.4 J1.A1/B12 J1.B1/A12 J1.S1 J1.S2 J1.S3 J1.S4 J2.2 J2.3 J3.6 J3.G1 J3.G2 J3.G3 J3.G4 J4.2 J6.10 JP1.3 JP2.3 JP3.3 JP4.3 R1.1 R2.2 R9.1 R10.1 R11.1 S1.3 U1.3 U1.8 U1.9 U2.5 U3.5 U3.18 U3.35 U3.42 U5.1 U5.2 U5.3 U5.4 U5.5 U5.14 U5.23 U5.24 U5.25 U$1.1_GND U$1.10_GND U$1.12_GND
I2C_SCL: I2C_SCL.TP IC1.14 IC3.13 R4.1 R6.1 R7.2 R18.2 U1.2 U3.32 U5.26
I2C_SDA: I2C_SDA.TP IC1.13 IC3.14 R3.1 R5.1 R8.2 R19.1 U1.4 U3.31 U5.27
LNA_EN: IC5.6 U$1.13_LNA_EN
LNA_OUT: IC5.3 U$1.11_RF_IN
LNA_VCC: IC5.2 LNA_VCC.TP U$1.14_VCC_RF
M0: JP1.1 R12.2
M1: JP2.1 R13.2
M2: JP3.1 R14.2
M3: JP4.1 R15.2
MPU_RX: GPS_TX.TP U3.16 U$1.2_TXD
MPU_TX: GPS_RX.TP U3.15 U$1.3_RXD
N$1: J1.A5 R1.2
N$2: J1.B5 R2.1
N$3: MPU_RST.TP U3.40
N$4: IC5.5 L1.1
N$5: TIME.TP U$1.4_TIMEPULSE
N$6: C14.1 U3.43
N$7: GPS_RST.TP U$1.9_RESET_N
N$8: IC2.1 U4.1
N$9: GPS_SDA.TP U$1.16_SDA
N$10: GPS_SCL.TP U$1.17_SCL
N$11: SWCLK.TP U3.45
N$12: SWDIO.TP U3.46
N$13: D1.C R11.2
N$14: IC4.4 L2.2
N$15: IC4.2 L2.1
N$16: R12.1 U5.6
N$17: R13.1 U5.7
N$18: R14.1 U5.8
N$19: R15.1 U5.9
RF_CLK: J6.03 U3.26
RF_CS: J5.02 U3.25
RF_DI: J6.02 U3.28
RF_DO: J6.01 U3.27
SD_CLK: J3.5 U3.20
SD_CS: J3.2 U3.8
SD_DETECT: J3.10 R9.2 U3.3
SD_DI: J3.3 U3.19
SD_DO: J3.7 U3.21
VBAT: J4.1 Q1.3
VBUS: CR1.2 J1.A4/B9 J1.B4/A9 Q1.1 R10.2 U2.4 VBUS.TP
WVI: C1.2 C19.1 CR1.1 IC2.4 IC4.5 IC4.6 IC4.9 IC4.10 Q1.2 REG_IN.TP S1.1 U4.3
XIN32: C16.1 U3.1 X1.2
XOUT32: C17.1 U3.2 X1.1

## Tracks (layer width: path | path; a pad name or v marks a point on that pad's centre or on a via)
3V3  (via drill 0.35, 0.6)
  Top 0.25: IC1.6 26.5,46.75 27.15,46.75 IC1.7 | IC1.1 23.7,50.75 23.6,50.85 C7.1 | IC3.5 29,37.5 29.95,36.55 C4.1 | IC3.8 28.25,41 | 28.25,41 28.25,41.2 C3.1 | R3.2 22.25,36.5 v21,37.75 22.25,39 R4.2 | U1.5 42.5,51.76 | U1.6 42.5,51.76 | 42.5,51.76 43.26,51 | 43.26,51 U1.1 46.2,51 C6.1 46.25,49.25 v45.75,48.75 45,48 C5.1 43.95,48.5 43.5,48.95 U1.10 43.5,50.76 43.26,51 | U3.17 17.75,15.1 C12.1 17,14.35 v17,13 | C13.1 C18.1 17,29.85 17,28.5 17,27.5 17.75,26.75 U3.44 | U3.6 13.25,21.75 12,20.5 C11.1 11.9,19.85 C10.1 8.6,19.85 v8,19.25 | U3.36 23.65,24.25 24.75,25.35 C15.1 25.6,25.35 26.25,26 26.25,27 26.25,27.25 26.25,27.5 26.25,27.75 | U4.2 42.07,19.91 43.16,21 44.2,21 45.25,19.95 C2.1 | U$1.8_VCC U$1.7_VCC_IO U$1.6_V_BCKP | J3.4 8.55,4.05 v8.75,4.25 | v15.75,7.5 15.05,8.2 J3.9 | IC3.12 26.25,38.5 26,38.75 26,39.5 26.75,40.25 27.5,40.25 28.25,41 | R5.2 42.8,58.25 v43,58.25 43.2,58.25 R6.2 | R18.1 31.25,32.95 | 31.25,32.95 R19.2 | 31.25,32.95 31.25,33 29.48,34.77 | REG_OUT.TP 49.72,25.47 U5.28
  Top 0.31: C2.1 45.55,19.5 D1.A | 44.2,21 46.45,23.25 REG_OUT.TP
  Top 0.5: IC2.5 42.45,18.2 v42.75,18.5 42,19.25 U4.2 | 21.25,32.5 21.25,31 24.5,27.75 26.25,27.75 33.5,27.75 34.24,28.49 J6.12 38.65,28.29 v38.65,27.05 | 17.15,32.15 C13.1 | C13.1 16.65,32 11.9,36.75 10.5,36.75 10.25,36.5 U$1.8_VCC | 28.25,41.2 27.95,41.5 22.25,41.5 21,40.25 v21,37.75 19.5,36.25 19.5,34.25 | C3.1 28.3,44.95 | 28.3,44.95 26.5,46.75 | IC1.6 24.8,46.75 C9.1 C8.1 21.25,49.5 22.75,51 23.45,51 23.6,50.85 | 28.3,44.95 28.3,45.05 v32.25,49 32.25,52 31.55,52.7 R8.1 30.2,53.25 R7.1 | 19.5,34.25 21.25,32.5 | C13.1 17.15,32.9 18.5,34.25 19.5,34.25 | 21.25,32.5 27.2,32.5 29.48,34.77 30.5,35.8 C4.1
  Route2 0.3: v8.75,4.25 12.75,4.25 15.75,7.25 v15.75,7.5 15.75,11.75 v17,13
  Route2 0.4: v32.25,49 35.5,49 37.75,46.75 43.75,46.75 v45.75,48.75 47.75,50.75 47.75,54.66 47.03,55.38 47.03,56.97 45.75,58.25 v43,58.25
  Route2 0.5: v42.75,18.5 38.65,18.5 | v38.65,27.05 38.65,18.5 | v8,19.25 8,16.5 11.5,13 v17,13 18.75,11.25 20.75,11.25 24.5,15 33,15 33.25,15.25 36.5,18.5 38.65,18.5
+5V  (via drill 0.35)
  Top 0.2: IC4.1 31,22.5 30.75,22.75 C20.1 29.35,22.75 28.25,23.85 28.25,26.25 29,27 31.75,27 | 31.75,27 32.25,27 33.75,27 34.1,27.35 v35.5,27.35 | IC4.12 31.75,27
  Top 0.6: JP4.2 44.75,42.5 47.25,45 JP3.2 | JP3.2 48.5,45 49.25,44.25 51.75,41.75 JP1.2 | JP3.2 50.25,47 50.25,48.75 51.5,50 JP2.2
  Route15 0.5: v35.5,27.35 35.5,29 35.75,29.25 37.25,30.75 37.25,35.75 JP4.2
ANTENNA
  Top 0.25: J2.1 L1.2
BRD_EN  (via drill 0.35)
  Top 0.25: v37.25,16 38.45,16 IC2.3
  Route15 0.25: v37.25,16 38,16.75 38,21.75 40.5,24.25 50.5,24.25 52.25,26 S1.2
D+
  Top 0.25: J1.A6 27.25,8.43 27.91,9.09 | 27.91,9.09 28.25,8.76 J1.B6 | 27.91,9.09 27.99,9.17 U2.2 28.49,11.83 30,13.34 30,14.5 28,16.5 28,19.12 23.88,23.25 U3.34
D-
  Top 0.25: J1.A7 27.75,6.75 27.5,6.5 27,6.5 26.75,6.75 J1.B7 26.75,8.5 27.51,9.26 U2.1 27.26,11.83 25.59,13.5 25.59,14.52 27.5,16.43 27.5,18.88 23.62,22.75 U3.33
DIO0  (via drill 0.35)
  Top 0.25: U3.39 v20.25,24.25 | v32.75,35 33.86,36.11 J6.09
  Route2 0.25: v20.25,24.25 20.5,24.5 22.11,24.5 32.61,35 v32.75,35
DIO1  (via drill 0.35)
  Top 0.25: U3.41 v19.25,24.25 | v37,37.5 37.25,37.5 38.4,38.65 J6.08
  Route2 0.25: v19.25,24.25 20,25 22,25 32,35 32,36.75 32.75,37.5 v37,37.5
GND  (via drill 0.35, 0.6)
  Top 0.2: U2.5 28,12.25 28.25,12.25 29,13 v29,13.75 | IC4.3 32.55,23.8 IC4.13 | IC4.11 32.15,24.6 IC4.13 | C19.2 35,24.75 34.25,24 IC4.13 | IC4.13 31.25,24 30.5,24.75 C20.2 29.05,25.7 v29.05,25.8
  Top 0.25: C8.2 v21.25,42.5 | C9.2 v24,42.5 | C7.2 23.55,49 v25,49 | IC1.12 29.05,49.95 v29.75,49.25 | IC3.3 27.75,35.75 v27.5,35.5 27.25,35.75 IC3.2 | IC3.6 IC3.7 28.46,38.45 C4.2 | C4.2 30.45,38.5 C4.2 | C4.2 30.95,38.45 31.75,39.25 v31.75,40 30.5,41.25 C3.2 | U1.9 U1.8 42.5,49 42.05,48.55 C5.2 40.75,48 v40.75,48.25 | R1.1 22.39,9.09 J1.S1 | R2.2 32.61,9.34 J1.S2 | IC5.4 10.28,48.75 v11,48.75 | J2.3 11.22,57 10.47,57.75 v9.75,57.75 9.03,57.75 8.28,57 J2.2 | U$1.10_GND 11.25,44.85 v11.25,46.5 | U1.3 43.75,52.26 v43.75,53.5 | C6.2 v46.25,54.25 | U3.18 18.25,15.1 C12.2 19,14.35 v19,13 | U3.42 18.75,26.9 C14.2 | C14.2 19.85,28.25 18.85,29.25 C18.2 C13.2 v20,32 | C10.2 v9.5,16.75 | C11.2 v12,16.75 | U3.5 13.25,22.25 v12.75,22.75 | U3.35 25.15,23.75 C15.2 26,22.9 v26,22.5 | R11.1 v47,18.25 | C2.2 v45.25,16 | C1.1 v36,13.25 | 9.15,42.9 v9,42.75 9.15,42.9 | U$1.1_GND 2.6,33.85 v2.5,33.75 | R9.1 v17.25,8 | J3.6 6.36,3.35 v6.5,3.5 | J3.G2 v3,4.25 | J3.G1 14.25,2.24 v14.25,3.75 | J3.G3 3.38,12.88 v3.25,12.75 | J3.G4 9.38,12.88 v9.25,12.75 | C14.2 v21,28 | IC5.1 8.88,47.75 v8.75,47.75 | 9.15,42.9 U$1.12_GND | U5.1 U5.2 48.75,32.17 48.5,32.17 U5.3 U5.4 U5.5 | U5.25 U5.24 | U5.24 U5.23 | U5.24 47.13,27.63 v47.25,27.75 | v41.6,33.8 41.28,33.48 U5.14
  Top 0.31: v48.75,14.5 48.55,14.5 R10.1
  Top 0.4: U5.3 48.42,30.67 v48.25,30.5
  Top 0.5: J6.10 38.45,31.5 v38.55,31.4
  Top 0.6: J1.B1/A12 32.03,7.58 J1.S2 32.61,5 | J1.A1/B12 22.96,7.58 J1.S1 22.39,5 | J1.S3 22.39,5 | 32.61,5 J1.S4 | 22.39,5 v23.5,5 | 32.61,5 v31.5,5 | IC2.2 37.3,17.25 v37.2,17.35 | v46,9.5 44.5,9.5 J4.2
  other vias: 10.65,21.65 7.65,21.65 7.65,24 7.65,26.35 10.65,26.35 12.75,25.25
  pour Bottom: 0,60 0,0 55,0 55,60
  pour Top: 15,23 13.5,23 11.75,21.25 7.25,21.25 7.25,26.75 11.75,26.75 13.5,25 15,25
I2C_SCL  (via drill 0.35)
  Top 0.25: IC1.14 27.25,52.25 26.3,53.2 R7.2 25.5,53.25 v24.75,54 23,55.75 I2C_SCL.TP | IC3.13 25.45,38 R4.1 24.5,39.05 v24.5,40.5 | U1.2 44.75,52.49 44.75,54.8 R6.1 45.8,55.05 v46.25,55.5 | v21,23 21.75,22.25 U3.32 | U5.26 48.42,27.83 46.75,29.5 30.8,29.5 R18.2 29.7,29.5 25.75,29.5 25.25,30 v25.25,30.25
  Route2 0.25: v25.25,30.25 25.25,39.75 v24.5,40.5 24,41 20.25,41 19.5,41.75 19.5,48.75 v24.75,54 24.75,56 26.75,58 38.32,58 40.32,56 45.75,56 v46.25,55.5
  Route15 0.25: v25.25,30.25 25.25,27.75 21,23.5 v21,23
I2C_SDA  (via drill 0.35)
  Top 0.25: IC1.13 29,50.75 30.7,50.75 R8.2 30.75,49.5 v31,49.25 | IC3.14 25.45,37.5 R3.1 24.45,35.55 25,35 v26,35 | U1.4 43,53 41.5,54.5 R5.1 42.8,55.05 v43,55.25 | I2C_SDA.TP 33,55.5 v33,55.25 | v21,21.25 21.5,21.75 U3.31 | U5.27 49.08,27.92 47,30 33.55,30 R19.1 32.45,31 27,31 v26.25,30.25
  Route2 0.25: v26.25,30.25 26.25,34.75 v26,35 26,41 31,46 v31,49.25 33,51.25 v33,55.25 33,56.5 34,57.5 38.25,57.5 40.75,55 42.75,55 v43,55.25
  Route15 0.25: v26.25,30.25 26.25,27.25 21,22 v21,21.25
LNA_EN  (via drill 0.35)
  Top 0.25: U$1.13_LNA_EN 8.05,46.05 v8.25,46.25 | IC5.6 8.12,48.62 v8,48.5
  Route15 0.25: v8.25,46.25 8.25,47.32 8,47.57 v8,48.5
LNA_OUT
  Top 0.25: U$1.11_RF_IN 10.4,44.95 10.4,47.98 IC5.3
LNA_VCC
  Top 0.25: U$1.14_VCC_RF 6.95,46 6.95,46.2 7,46.25 7.25,46.5 | 7.25,46.5 7.75,47 9.5,47 9.75,47.25 IC5.2 | 7.25,46.5 7.25,51.25 LNA_VCC.TP
M0
  Top 0.3: R12.2 50.75,37.71 JP1.1
M1  (via drill 0.35)
  Top 0.3: v48.5,39.75 48.25,39.5 R13.2
  Route2 0.3: JP2.1 50.25,45.46 50.25,41.5 v48.5,39.75
M2
  Top 0.3: JP3.1 48.25,41.96 46.25,39.96 46.25,38.95 R14.2
M3
  Top 0.3: JP4.1 R15.2
MPU_RX  (via drill 0.35)
  Top 0.25: U$1.2_TXD 3.65,33.4 2.75,32.5 v2.75,30.75 GPS_TX.TP | v15.5,15.5 16.87,15.5 17.25,15.88 U3.16
  Route15 0.25: v2.75,30.75 2,30 2,17.5 4.25,15.25 15.25,15.25 v15.5,15.5
MPU_TX  (via drill 0.35)
  Top 0.25: U$1.3_RXD 4.75,33.75 4.5,33.5 v4.5,32 4.5,31.75 6.25,30 GPS_RX.TP | v14.75,16.25 16.5,16.25 16.75,16.5 U3.15
  Route15 0.25: v4.5,32 4.5,17.25 5.75,16 14.5,16 v14.75,16.25
N$1
  Top 0.25: J1.A5 26.25,10.95 R1.2
N$2
  Top 0.25: J1.B5 29.25,10.7 R2.1
N$3  (via drill 0.35)
  Top 0.25: U3.40 19.75,26.5 20.25,27 v21.25,27 | v3.75,17.5 3.5,17.25 MPU_RST.TP
  Route2 0.25: v3.75,17.5 5,17.5 5.75,18.25 5.75,26.25 6.75,27.25 7.25,27.25 8,28 14.25,28 15.25,27 v21.25,27
N$4
  Top 0.25: IC5.5 L1.1
N$5
  Top 0.25: U$1.4_TIMEPULSE 5.85,33.15 TIME.TP
N$6
  Top 0.25: U3.43 18.25,27.63 18.15,27.73 C14.1
N$7
  Top 0.25: U$1.9_RESET_N 11.3,32.05 GPS_RST.TP
N$8
  Top 0.4: U4.1 38.79,18.2 IC2.1
N$9
  Top 0.25: GPS_SDA.TP 5.5,47.25 4.75,46.5 U$1.16_SDA
N$10
  Top 0.25: U$1.17_SCL 3.65,46.6 2.25,48 GPS_SCL.TP
N$11
  Top 0.25: SWCLK.TP 3.5,24.22 7,27.72 7.62,27.72 8.89,29 14.75,29 17.25,26.5 U3.45
N$12
  Top 0.25: SWDIO.TP 4.25,19.25 5,20 5,25.07 7.18,27.25 8,27.25 9.25,28.5 14.68,28.5 16.75,26.43 U3.46
N$13
  Top 0.5: D1.C 49.88,18.48 R11.2
N$14
  Top 0.2: IC4.4 32.95,20.3 33.5,19.75 L2.2
N$15
  Top 0.2: IC4.2 32.15,20.15 31.25,19.25 L2.1
N$16
  Top 0.3: U5.6 46.47,32.97 47,33.5 49.75,33.5 50.75,34.5 R12.1
N$17
  Top 0.3: U5.7 45.83,33.13 46.75,34.05 47.75,34.05 R13.1
N$18
  Top 0.3: R14.1 45.17,33.97 U5.8
N$19
  Top 0.3: U5.9 44.53,34.22 44,34.75 R15.1
RF_CLK  (via drill 0.35)
  Top 0.25: v26.25,17.75 25.25,17.75 23.75,19.25 U3.26 | v35,50.25 35,51.1 J6.03
  Route15 0.25: v35,50.25 34.5,49.75 34.5,32.75 28.25,26.5 28.25,21.5 26.75,20 26.75,18.25 v26.25,17.75
RF_CS  (via drill 0.35)
  Top 0.25: U3.25 23.5,18.75 v25.5,16.75 | v14.5,53.75 14.64,53.89 J5.02
  Route15 0.25: v25.5,16.75 25.25,16.5 24,16.5 13.5,27 13.5,52.75 v14.5,53.75
RF_DI  (via drill 0.35)
  Top 0.25: v25.5,19.75 25,19.75 24.5,20.25 U3.28 | v34,53.75 34.14,53.89 J6.02
  Route15 0.25: v25.5,19.75 25.5,20.25 27.25,22 27.25,27 33.5,33.25 33.5,53.25 v34,53.75
RF_DO  (via drill 0.35)
  Top 0.25: v25.75,18.75 25,18.75 24,19.75 U3.27 | v35.25,55 J6.01
  Route15 0.25: v25.75,18.75 26.25,19.25 26.25,20.25 26.75,20.75 27.75,21.75 27.75,26.75 34,33 34,52.25 35.25,53.5 v35.25,55
SD_CLK  (via drill 0.35)
  Top 0.25: U3.20 19.25,16.5 21,14.75 v21.5,14.75 | v7.5,3.25 7.5,2.1 J3.5
  Route15 0.25: v21.5,14.75 21,14.75 20.75,15 16.93,15 7.5,5.57 v7.5,3.25
SD_CS
  Top 0.25: J3.2 10.76,10.51 13.23,12.98 13.23,20.36 13.62,20.75 U3.8
SD_DETECT
  Top 0.25: R9.2 16.8,11.9 J3.10 14.49,12.76 14,13.25 14,17 15.25,18.25 15.5,18.5 15.5,23 15.25,23.25 U3.3
SD_DI  (via drill 0.35)
  Top 0.25: v20.5,14.25 20.5,14.5 18.75,16.25 U3.19 | v9.75,3.25 9.75,2.15 J3.3
  Route15 0.25: v20.5,14.25 17,14.25 9.75,7 v9.75,3.25
SD_DO  (via drill 0.35)
  Top 0.25: U3.21 19.75,16.57 20.57,15.75 v21.5,15.75 | v5.25,3.25 J3.7
  Route15 0.25: v5.25,3.25 5.25,4.14 16.86,15.75 v21.5,15.75
VBAT
  Top 0.31: Q1.3 J4.1
VBUS  (via drill 0.35, 0.6)
  Top 0.25: U2.4 27.51,13.17 26.68,14 v26.25,14
  Top 0.31: v43,14.75 43,13.75 Q1.1 43.35,13.4 43.75,13 43.75,11.5 44.16,11.1 CR1.2 47.05,11.1 R10.2
  Top 0.6: J1.B4/A9 29.9,8.65 v30.25,9 | J1.A4/B9 25.1,9.1 v25.25,9.25 | v17.75,6.25 18.25,5.75 18.25,4.25 VBUS.TP
  Route15 0.6: v17.75,6.25 17.75,6.75 20.25,9.25 v25.25,9.25 25.75,9.75 | 25.75,9.75 29.5,9.75 v30.25,9 37.25,9 v43,14.75 | 25.75,9.75 25.75,13.5 v26.25,14
WVI
  Top 0.2: IC4.5 IC4.6 34.75,22.5 35,22.75 C19.1 | IC4.10 32.75,25.5 IC4.9 | 32.95,26.17 33.08,26.3
  Top 0.25: 41.25,15.3 C1.2 | REG_IN.TP 52.25,18.75 51,20 49.75,21.25 49.75,22.75 51,24 S1.1
  Top 0.3: 32.75,25.5 32.75,26.22 32.83,26.3
  Top 0.31: IC2.4 41.25,15.3 42,14.55 Q1.2
  Top 0.4: U4.3 43.5,19.16 43.75,18.91 43.75,17.75 43,17 | IC2.4 42.3,16.3 43,17 | 43,17 45.09,14.9 CR1.1 47.41,14.9 48.25,15.75 REG_IN.TP
  Top 0.5: IC2.4 39.95,15 36.5,15 36.05,15.45 36.05,17.6 36.9,18.45 36.9,21.6 C19.1 36.5,22.75 37.5,23.75 37.5,25.5 36.7,26.3 33.33,26.3 33.08,26.3 32.83,26.3
XIN32
  Top 0.2: U3.1 12.52,24.25 12.25,24.52 C16.1 10.98,24.52 10.25,25.25 X1.2
XOUT32
  Top 0.2: U3.2 12.52,23.75 12.25,23.48 C17.1 10.98,23.48 10.25,22.75 X1.1

## Text on the board
tNames: X | Z | Y